# Altium PCB ArduinoUnoShield.PcbDoc
Units mm, origin at the board's own origin, x right, y up, seen from the top; angles counter-clockwise.
Board outline 98.42 x 71.12 mm, 2 copper layers (Top Layer, Bottom Layer); 19 components, 29 nets, 69 pads, 0 vias.
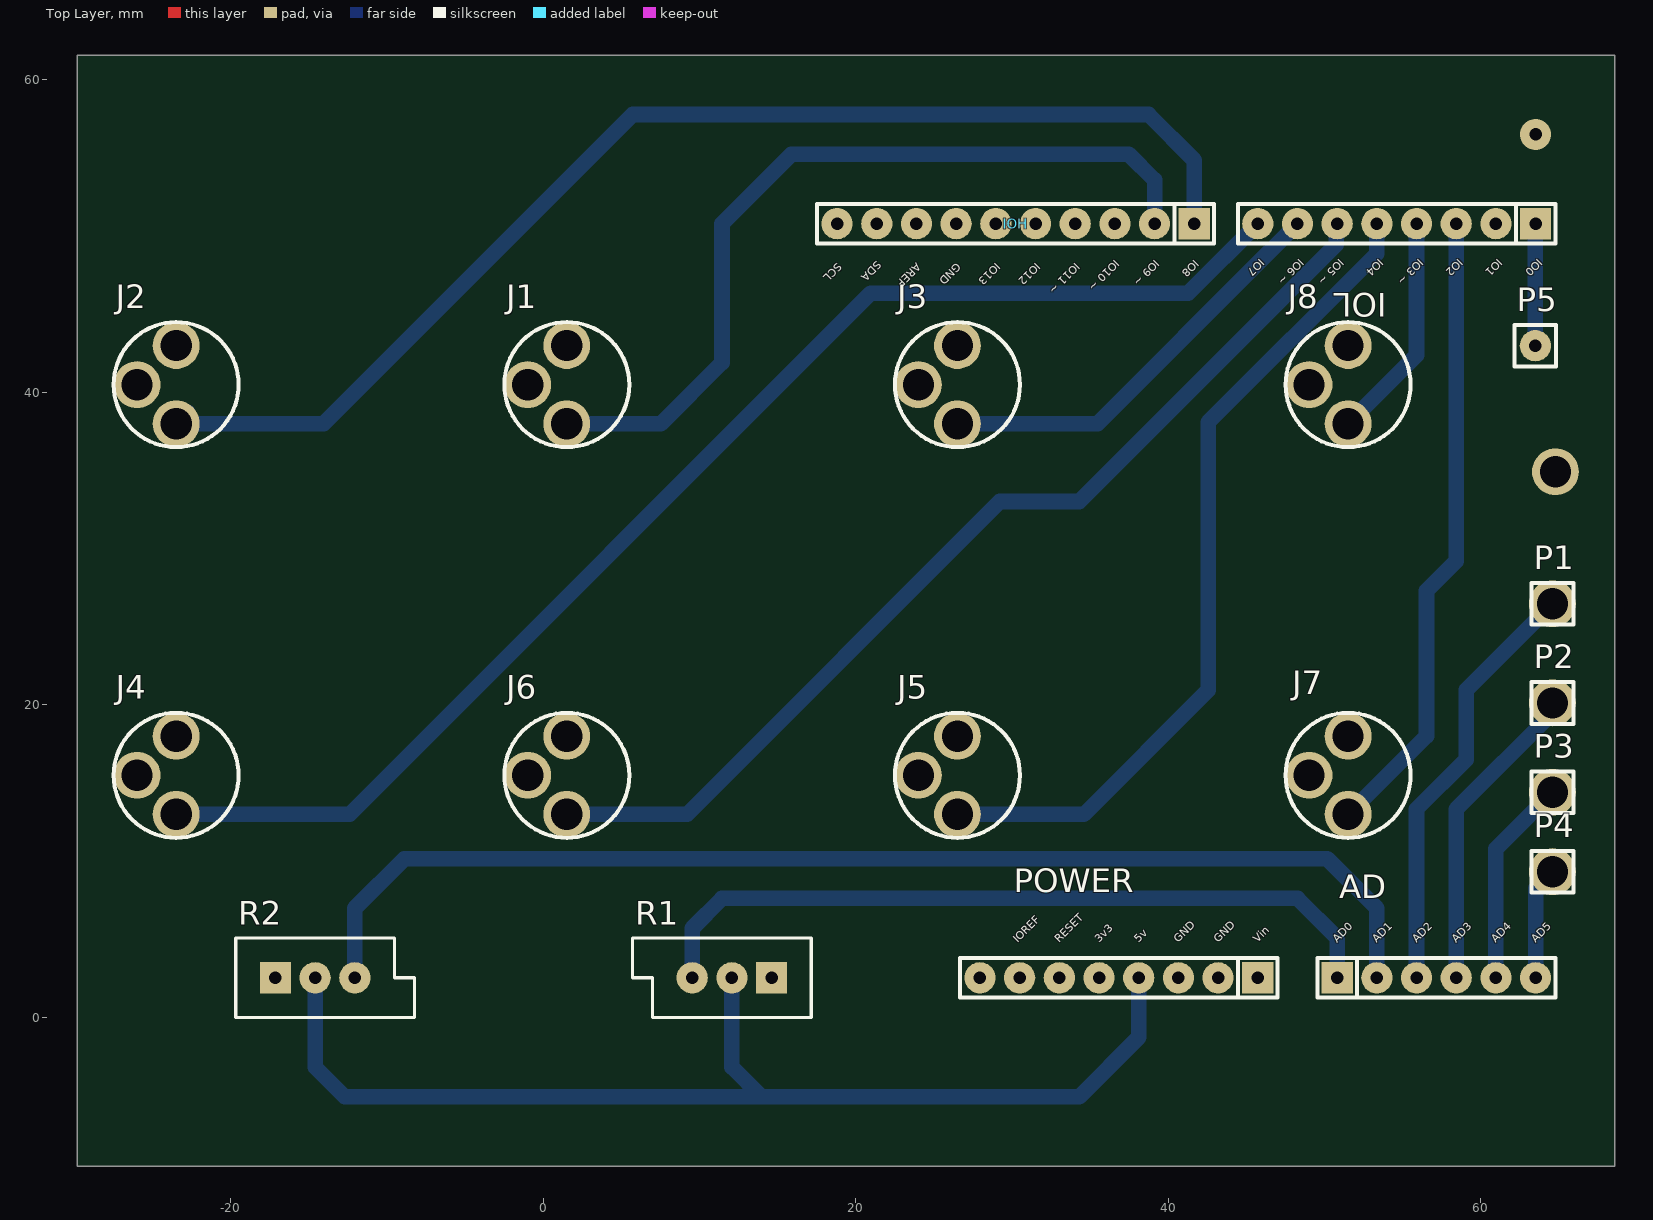
[diagram p0: Top Layer view]
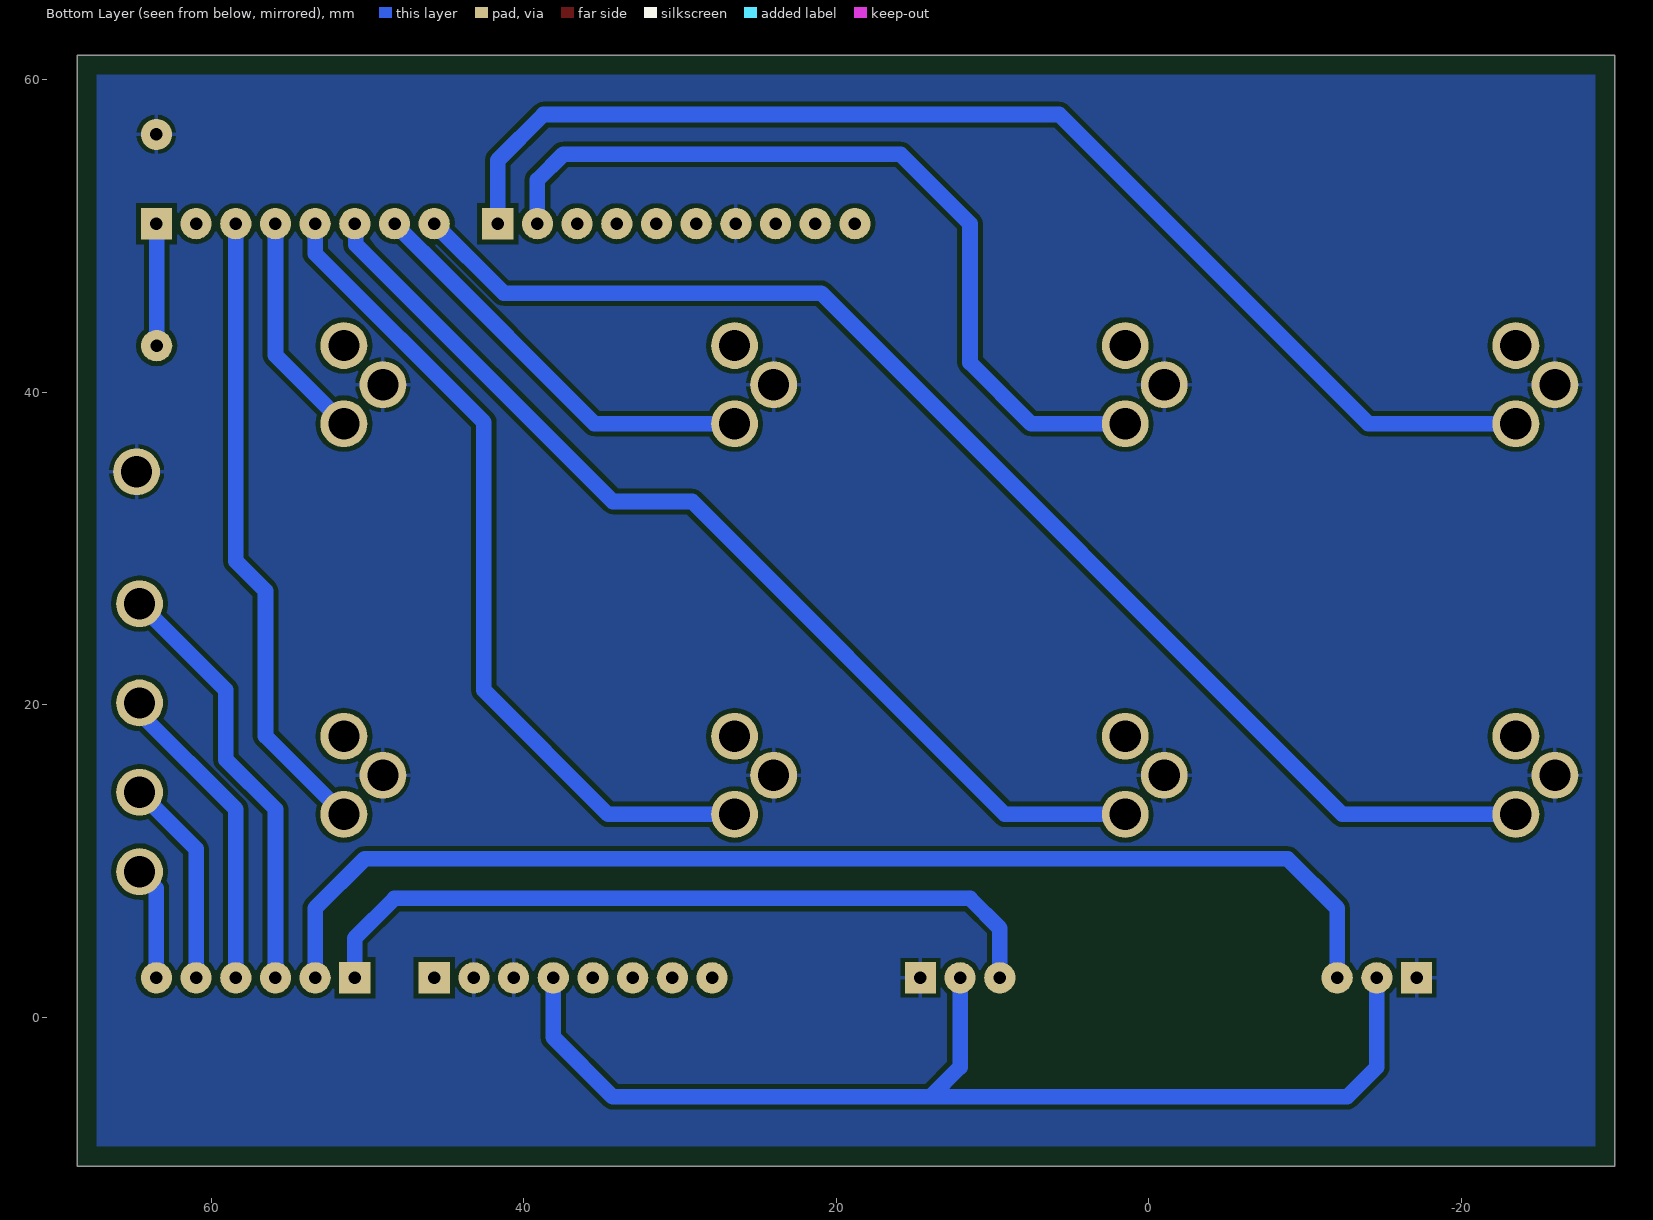
[diagram p1: Bottom Layer view, seen from below]

## Layer stack, top to bottom
Top Layer: signal copper 0.0356
Dielectric: dielectric 0.32, FR-4, Dk 4.8
Bottom Layer: signal copper 0.0356

## Board outline
-29.845,61.595 -29.845,-9.525 68.58,-9.525 68.58,61.595 -29.845,61.595

## Design rules (kind name [scope] priority, off if disabled: settings)
Clearance [All] p1: gap=0.3
PolygonConnect [All] p1: connectstyle=Relief reliefconductorwidth=0.254 reliefentries=4 polygonreliefangle="90 Angle" airgapwidth=0.254
RoomDefinition ArduinoUnoShield [InComponentClass('ArduinoUnoShield')] p1: confinementstyle=ConfineOut formatcopy=TRUE lockcomponents=FALSE outline 98.425,-1.016 113.411,-1.016 113.411,10.795 98.425,10.795
RoutingVias [All] p1: holewidth=0.711 width=1.27 viastyle="Through Hole" minholewidth=0.711 minwidth=1.27 maxholewidth=0.711 maxwidth=1.27
SilkToSolderMaskClearance SilkscreenOverComponentPads [IsPad] p1: minsilkscreentomaskgap=0.254 clearancetoexposedcopper=TRUE
SolderMaskExpansion [All] p1: expansion=0.102
Width [All] p1: maxlimit=1 minlimit=1 preferedwidth=1
27 further rules are at their usual default settings.

## Components (designator, comment, footprint, x,y, rotation, side; value= is the part's Value field where it differs from the comment)
AD "AD" "Header 6x1 8.5mm" 50.8,2.54 r0 top locked
IOH "IOH" "Header 10x1 8.5mm" 41.656,50.8 r180 top locked
IOL "IOL" "Header 8x1 8.5mm" 63.5,50.8 r180 top locked
J1 "Jack_Mono" JACK_MONO 3,33 r90 top
J2 "Jack_Mono" JACK_MONO -22,33 r90 top
J3 "Jack_Mono" JACK_MONO 28,33 r90 top
J4 "Jack_Mono" JACK_MONO -22,8 r90 top
J5 "Jack_Mono" JACK_MONO 28,8 r90 top
J6 "Jack_Mono" JACK_MONO 3,8 r90 top
J7 "Jack_Mono" JACK_MONO 53,8 r90 top
J8 "Jack_Mono" JACK_MONO 53,33 r90 top
P1 "ONE_PIN" ONE_PIN#1 61.595,23.495 r0 top
P2 "ONE_PIN" ONE_PIN#1 61.595,17.145 r0 top
P3 "ONE_PIN" ONE_PIN#1 61.595,11.43 r0 top
P4 "ONE_PIN" ONE_PIN#1 61.595,6.35 r0 top
P5 "ONE_PIN" ONE_PIN#2 60.5,40.005 r0 top
POWER "POWER_UNO" "Header 8x1 8.5mm" 45.72,2.54 r180 top locked
R1 "RPot" VR5 12.065,2.54 r180 top
R2 "RPot" VR5 -14.605,2.54 r0 top

## Footprints (in the part's own frame and the unit in brackets; to place one, negate y for a bottom-side part, rotate by r counter-clockwise, add the part's x,y. Pads: shape width x height; smd on the part's side, far side on the other; paste and mask are expansions set on the pad)
"Header 6x1 8.5mm" [mm] "Stackable 6 pin header"
  rect 2x2 hole 0.8: 1(0,0)
  round 2 hole 0.8: 2(2.54,0) 3(5.08,0) 4(7.62,0) 5(10.16,0) 6(12.7,0)
  silkscreen extent -1.27,-1.27 13.97,1.27, body extent -1.27,-1.27 13.97,1.27, height 8.5
"Header 8x1 8.5mm" [mm] "Stackable 8 pin header"
  rect 2x2 hole 0.8: 1(0,0)
  round 2 hole 0.8: 2(2.54,0) 3(5.08,0) 4(7.62,0) 5(10.16,0) 6(12.7,0) 7(15.24,0) 8(17.78,0)
  silkscreen extent -1.27,-1.27 19.05,1.27, body extent -1.27,-1.27 19.05,1.27, height 8.5
"Header 10x1 8.5mm" [mm] "Stackable 10 pin header"
  rect 2x2 hole 0.8: 1(0,0)
  round 2 hole 0.8: 2(2.54,0) 3(5.08,0) 4(7.62,0) 5(10.16,0) 6(12.7,0) 7(15.24,0) 8(17.78,0) 9(20.32,0) 10(22.86,0)
  silkscreen extent -1.27,-1.27 24.13,1.27, body extent -1.27,-1.27 24.13,1.27, height 8.5
JACK_MONO [mm]
  round 3 hole 2: 1(5,1.5) 2(7.5,4) 3(10,1.5)
  silkscreen extent 3.5,-2.5 11.5,5.5
ONE_PIN#1 [mm]
  round 3 hole 2: 1(2.984,2.984)
  silkscreen extent 1.65,1.65 4.32,4.32
ONE_PIN#2 [mm]
  round 2 hole 0.8: 1(2.985,2.984)
  silkscreen extent 1.65,1.65 4.32,4.32
VR5 [mm] "Thru-Hole; 3 Leads"
  rect 2x2 hole 0.8: 1(-2.54,0)
  round 2 hole 0.8: 2(0,0) 3(2.54,0)
  silkscreen extent -5.08,-2.54 6.35,2.54

## Part data
R1 R2: "Potentiometer"

## Free pads (board coordinates)
  round 2 hole 0.8: 0(63.5,56.515)
  round 3 hole 2: 1(64.77,34.925)

## Nets (pads, with @x,y where several pads share a name; then routed paths per layer and width w, separated by ;. In a path a pad name is that pad's centre, name@x,y a point inside that pad or via, vN(x,y) a via of type N, cw(c..) or ccw(c..) an arc to the next point about the centre after c; other vN are vias at no path point)
3V3: POWER.5
5V: POWER.4 R1.2 R2.2 | length 72.4
  Bottom Layer w1: R2.2@-14.605,1.905 -14.605,-3.175 -12.7,-5.08 13.97,-5.08 ; R1.2 12.065,-3.175 13.97,-5.08 ; POWER.4 38.1,-1.27 34.29,-5.08 13.97,-5.08
AD0: AD.1 R1.3 | length 48.8
  Bottom Layer w1: R1.3 9.525,5.715 11.43,7.62 48.26,7.62 50.8,5.08 AD.1
AD1: AD.2 R2.3 | length 76.9
  Bottom Layer w1: R2.3 -12.065,6.985 -8.89,10.16 50.165,10.16 53.34,6.985 AD.2
AD2: AD.3 P1.1 | length 27.5
  Bottom Layer w1: AD.3 55.88,13.335 59.055,16.51 59.055,20.955 P1.1
AD3: AD.4 P2.1 | length 20.1
  Bottom Layer w1: AD.4 58.42,13.335 64.579,19.494 P2.1
AD4: AD.5 P3.1 | length 13.4
  Bottom Layer w1: AD.5 60.96,10.795 P3.1
AD5: AD.6 P4.1 | length 7.2
  Bottom Layer w1: AD.6 63.5,8.255 P4.1
AREF: IOH.8
GND: IOH.7 J1.2 J2.2 J3.2 J4.2 J5.2 J6.2 J7.2 J8.2 pad.0 pad.1 POWER.2 POWER.3 R1.1 R2.1
IO0: IOL.1 P5.1 | length 7.8
  Bottom Layer w1: P5.1 IOL.1@63.485,50.785
IO1: IOL.2
IO2: IOL.3 J7.1 | length 40.7
  Bottom Layer w1: J7.1 56.515,18.015 56.515,27.305 58.42,29.21 IOL.3
IO3: IOL.4 J8.1 | length 14.6
  Bottom Layer w1: J8.1 55.88,42.38 IOL.4
IO4: IOL.5 J5.1 | length 53.7
  Bottom Layer w1: J5.1 34.59,13 42.545,20.955 42.545,38.1 53.34,48.895 IOL.5
IO5: IOL.6 J6.1 | length 65.7
  Bottom Layer w1: J6.1 9.19,13 29.21,33.02 34.29,33.02 50.741,49.471 IOL.6@50.741,50.8
IO6: IOL.7 J3.1 | length 27.1
  Bottom Layer w1: J3.1 35.46,38 46.46,49 46.466,49 47.52,50.054 47.52,50.06 IOL.7
IO7: IOL.8 J4.1 | length 84.9
  Bottom Layer w1: J4.1 -12.4,13 20.955,46.355 41.275,46.355 IOL.8
IO8: IOH.1 J2.1 | length 79.7
  Bottom Layer w1: J2.1@-22.765,38.735 J2.1 -14.07,38 5.715,57.785 38.735,57.785 41.656,54.864 IOH.1
IO9: IOH.2 J1.1 | length 53.4
  Bottom Layer w1: J1.1 7.52,38 11.43,41.91 11.43,50.8 15.875,55.245 37.465,55.245 39.116,53.594 IOH.2
IO10: IOH.3
IO11: IOH.4
IO12: IOH.5
IO13: IOH.6
IOREF: POWER.7
RESET: POWER.6
SCL: IOH.10
SDA: IOH.9
VIN: POWER.1
pads on no net: J1.3 J2.3 J3.3 J4.3 J5.3 J6.3 J7.3 J8.3 POWER.8

## Polygon pours and split planes (outlines as drawn)
GND on Bottom Layer "Bot GND" (solid, remove dead copper, pour order 3): -28.575,60.325 -28.575,-8.255 67.31,-8.255 67.31,60.325 -28.575,60.325

## Silkscreen, mask and mechanical layers (free items; w line width, h text height)
Top Overlay:
  text "IO7" at 45.847,48.588 h0.51 r225
  text "IO6 ~" at 48.387,48.588 h0.51 r225
  text "IO5 ~" at 50.927,48.588 h0.51 r225
  text "IO4" at 53.467,48.588 h0.51 r225
  text "IO3 ~" at 56.007,48.588 h0.51 r225
  text "IO2" at 58.547,48.588 h0.51 r225
  text "IO1" at 61.087,48.588 h0.51 r225
  text "IO0" at 63.627,48.588 h0.51 r225
  text "IO10 ~" at 36.576,48.514 h0.51 r225
  text "IO9 ~" at 39.116,48.514 h0.51 r225
  text "IO8" at 41.656,48.514 h0.51 r225
  text "SDA" at 21.336,48.461 h0.51 r225
  text "SCL" at 18.796,48.334 h0.51 r225
  text "AREF" at 23.876,48.334 h0.51 r225
  text "GND" at 26.416,48.334 h0.51 r225
  text "IO13" at 28.956,48.334 h0.51 r225
  text "IO12" at 31.496,48.334 h0.51 r225
  text "IO11 ~" at 34.036,48.334 h0.51 r225
  text "IOREF" at 30.353,4.752 h0.51 r45
  text "RESET" at 33.02,4.752 h0.51 r45
  text "3v3" at 35.56,4.752 h0.51 r45
  text "5v" at 38.1,4.752 h0.51 r45
  text "GND" at 40.64,4.752 h0.51 r45
  text "GND" at 43.18,4.752 h0.51 r45
  text "Vin" at 45.72,4.752 h0.51 r45
  text "AD0" at 50.8,4.752 h0.51 r45
  text "AD1" at 53.34,4.752 h0.51 r45
  text "AD2" at 55.88,4.752 h0.51 r45
  text "AD3" at 58.42,4.752 h0.51 r45
  text "AD4" at 60.96,4.752 h0.51 r45
  text "AD5" at 63.5,4.752 h0.51 r45
  text "RESET" at 32.893,-63.881 h0.51 r45
  text "3v3" at 35.433,-63.881 h0.51 r45
  text "5v" at 37.973,-63.881 h0.51 r45
  text "GND" at 40.513,-63.881 h0.51 r45
  text "GND" at 43.053,-63.881 h0.51 r45
  text "Vin" at 45.593,-63.881 h0.51 r45
Bottom Solder:
  lines w0.127: 0,61.595 -29.845,61.595 -29.845,-9.525 2.54,-9.525
Mechanical 1:
  lines w0.127: 0,61.595 55.245,61.595 68.58,61.595 68.58,38.1 68.58,3.81 68.58,-4.445 68.58,-9.525 2.54,-9.525